# EAGLE board SOIC8_SO8W-DIP (EAGLE 8.4.3)
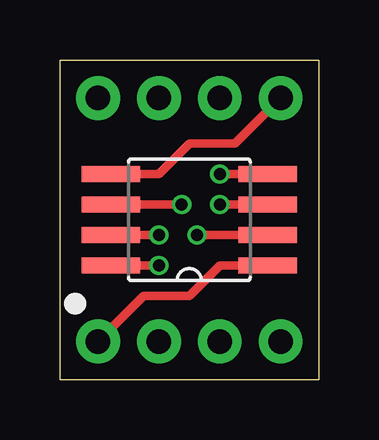
[diagram p0: board, top side]
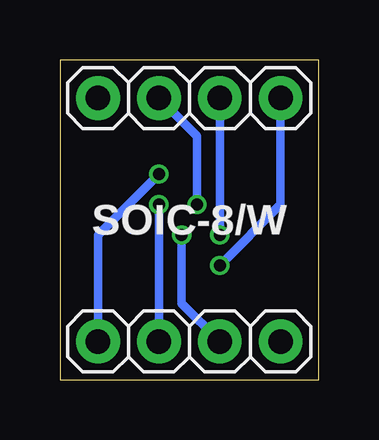
[diagram p1: board, bottom side, seen from below]

Size 10.79 x 13.34 mm. Coordinates in mm from the lower left corner, seen from the top.
Outline: 0,0 0,13.34 10.79,13.34 10.79,0 0,0
Copper layers (1*16): Top 0.035mm / dielectric 1.6mm / Bottom 0.035mm
Design rules "Elecrow_2-layer_PCB_eagle_rule *": minimum track width 6mil, minimum drill 12mil, track to track 6mil, track to pad 6mil, pad to pad 6mil, via to via 8mil, smd to smd 0mil, copper to edge 20mil, drill to drill 10mil, minimum pad ring 16mil, minimum via ring 6mil, stop-mask expansion 0mil, vias tented up to drill 100mil, thermal gap 10mil

## Footprints (pad centres in the part's own frame; a part is rotated, then mirrored left to right if it is on the bottom)
ADAPTER-8 = drill 1.016: 1 1.587,1.587; 2 4.128,1.587; 3 6.668,1.587; 4 9.207,1.587; 5 9.207,11.748; 6 6.668,11.748; 7 4.128,11.748; 8 1.587,11.748
SO8/W = smd 0.66 x 2.438: 1 -1.905,-3.277; 2 -0.635,-3.277; 3 0.635,-3.277; 4 1.905,-3.277; 5 1.905,3.277; 6 0.635,3.277; 7 -0.635,3.277; 8 -1.905,3.277

## Placement (x,y rotation side)
SOIC-8/W  ADAPTER-8  [ADAPTER-8]  0,0 0 top
U1  DUMMY8S  [SO8/W]  5.4,6.67 90 top

## Library data of the parts
SOIC-8/W = my-pinhead
U1 = my-ic

## Nets
N$1: SOIC-8/W.1 U1.1
N$2: SOIC-8/W.2 U1.2
N$3: SOIC-8/W.3 U1.3
N$4: SOIC-8/W.4 U1.4
N$5: SOIC-8/W.5 U1.5
N$6: SOIC-8/W.6 U1.6
N$7: SOIC-8/W.7 U1.7
N$8: SOIC-8/W.8 U1.8

## Tracks (layer width: path | path; a pad name or v marks a point on that pad's centre or on a via)
N$1
  Top 0.356: U1.1 6.67,4.76 5.4,3.49 3.49,3.49 SOIC-8/W.1
N$2  (via drill 0.5)
  Top 0.356: U1.2 v5.71,6.03
  Bottom 0.356: v5.71,6.03 5.71,3.17 SOIC-8/W.2
N$3  (via drill 0.5)
  Top 0.356: U1.3 v6.67,7.3
  Bottom 0.356: v6.67,7.3 SOIC-8/W.3
N$4  (via drill 0.5)
  Top 0.356: U1.4 v6.67,8.57
  Bottom 0.356: v6.67,8.57 9.21,6.03 SOIC-8/W.4
N$5
  Top 0.356: U1.5 4.13,8.57 5.4,9.84 7.3,9.84 SOIC-8/W.5
N$6  (via drill 0.5)
  Top 0.356: U1.6 v5.08,7.3
  Bottom 0.356: v5.08,7.3 5.08,10.16 SOIC-8/W.6
N$7  (via drill 0.5)
  Top 0.356: U1.7 v4.13,6.03
  Bottom 0.356: v4.13,6.03 SOIC-8/W.7
N$8  (via drill 0.5)
  Top 0.356: U1.8 v4.13,4.76
  Bottom 0.356: v4.13,4.76 1.59,7.3 SOIC-8/W.8